# Allegro board SMA_Prototype_B.brd
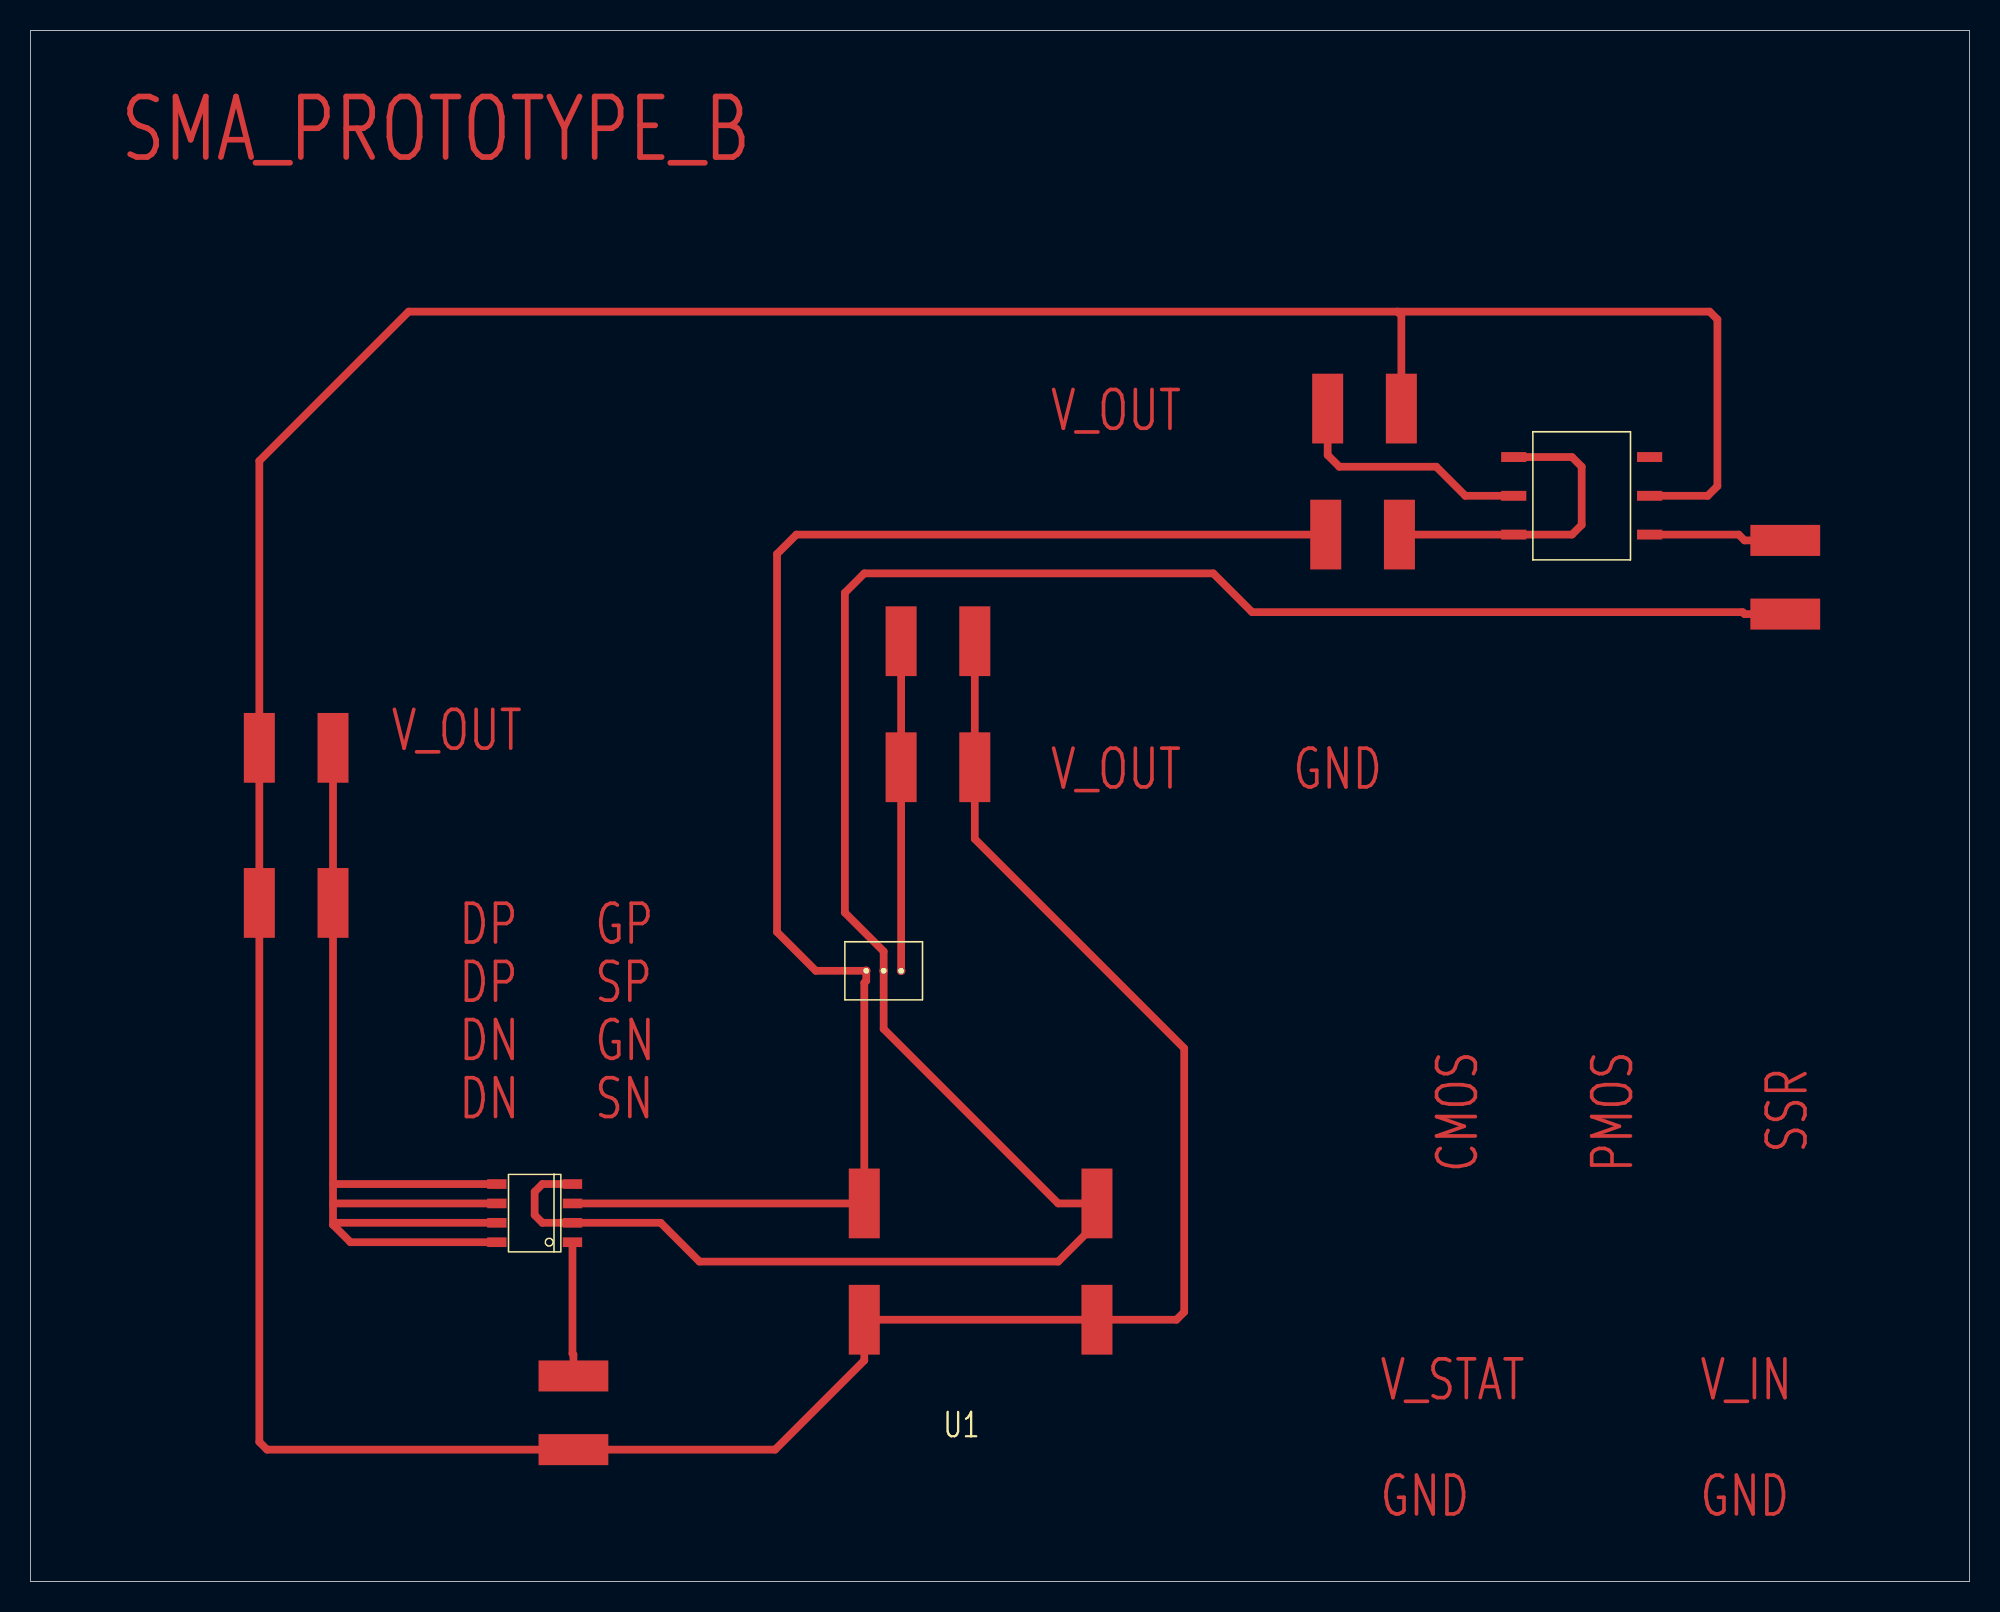
[diagram p0: board, top side]
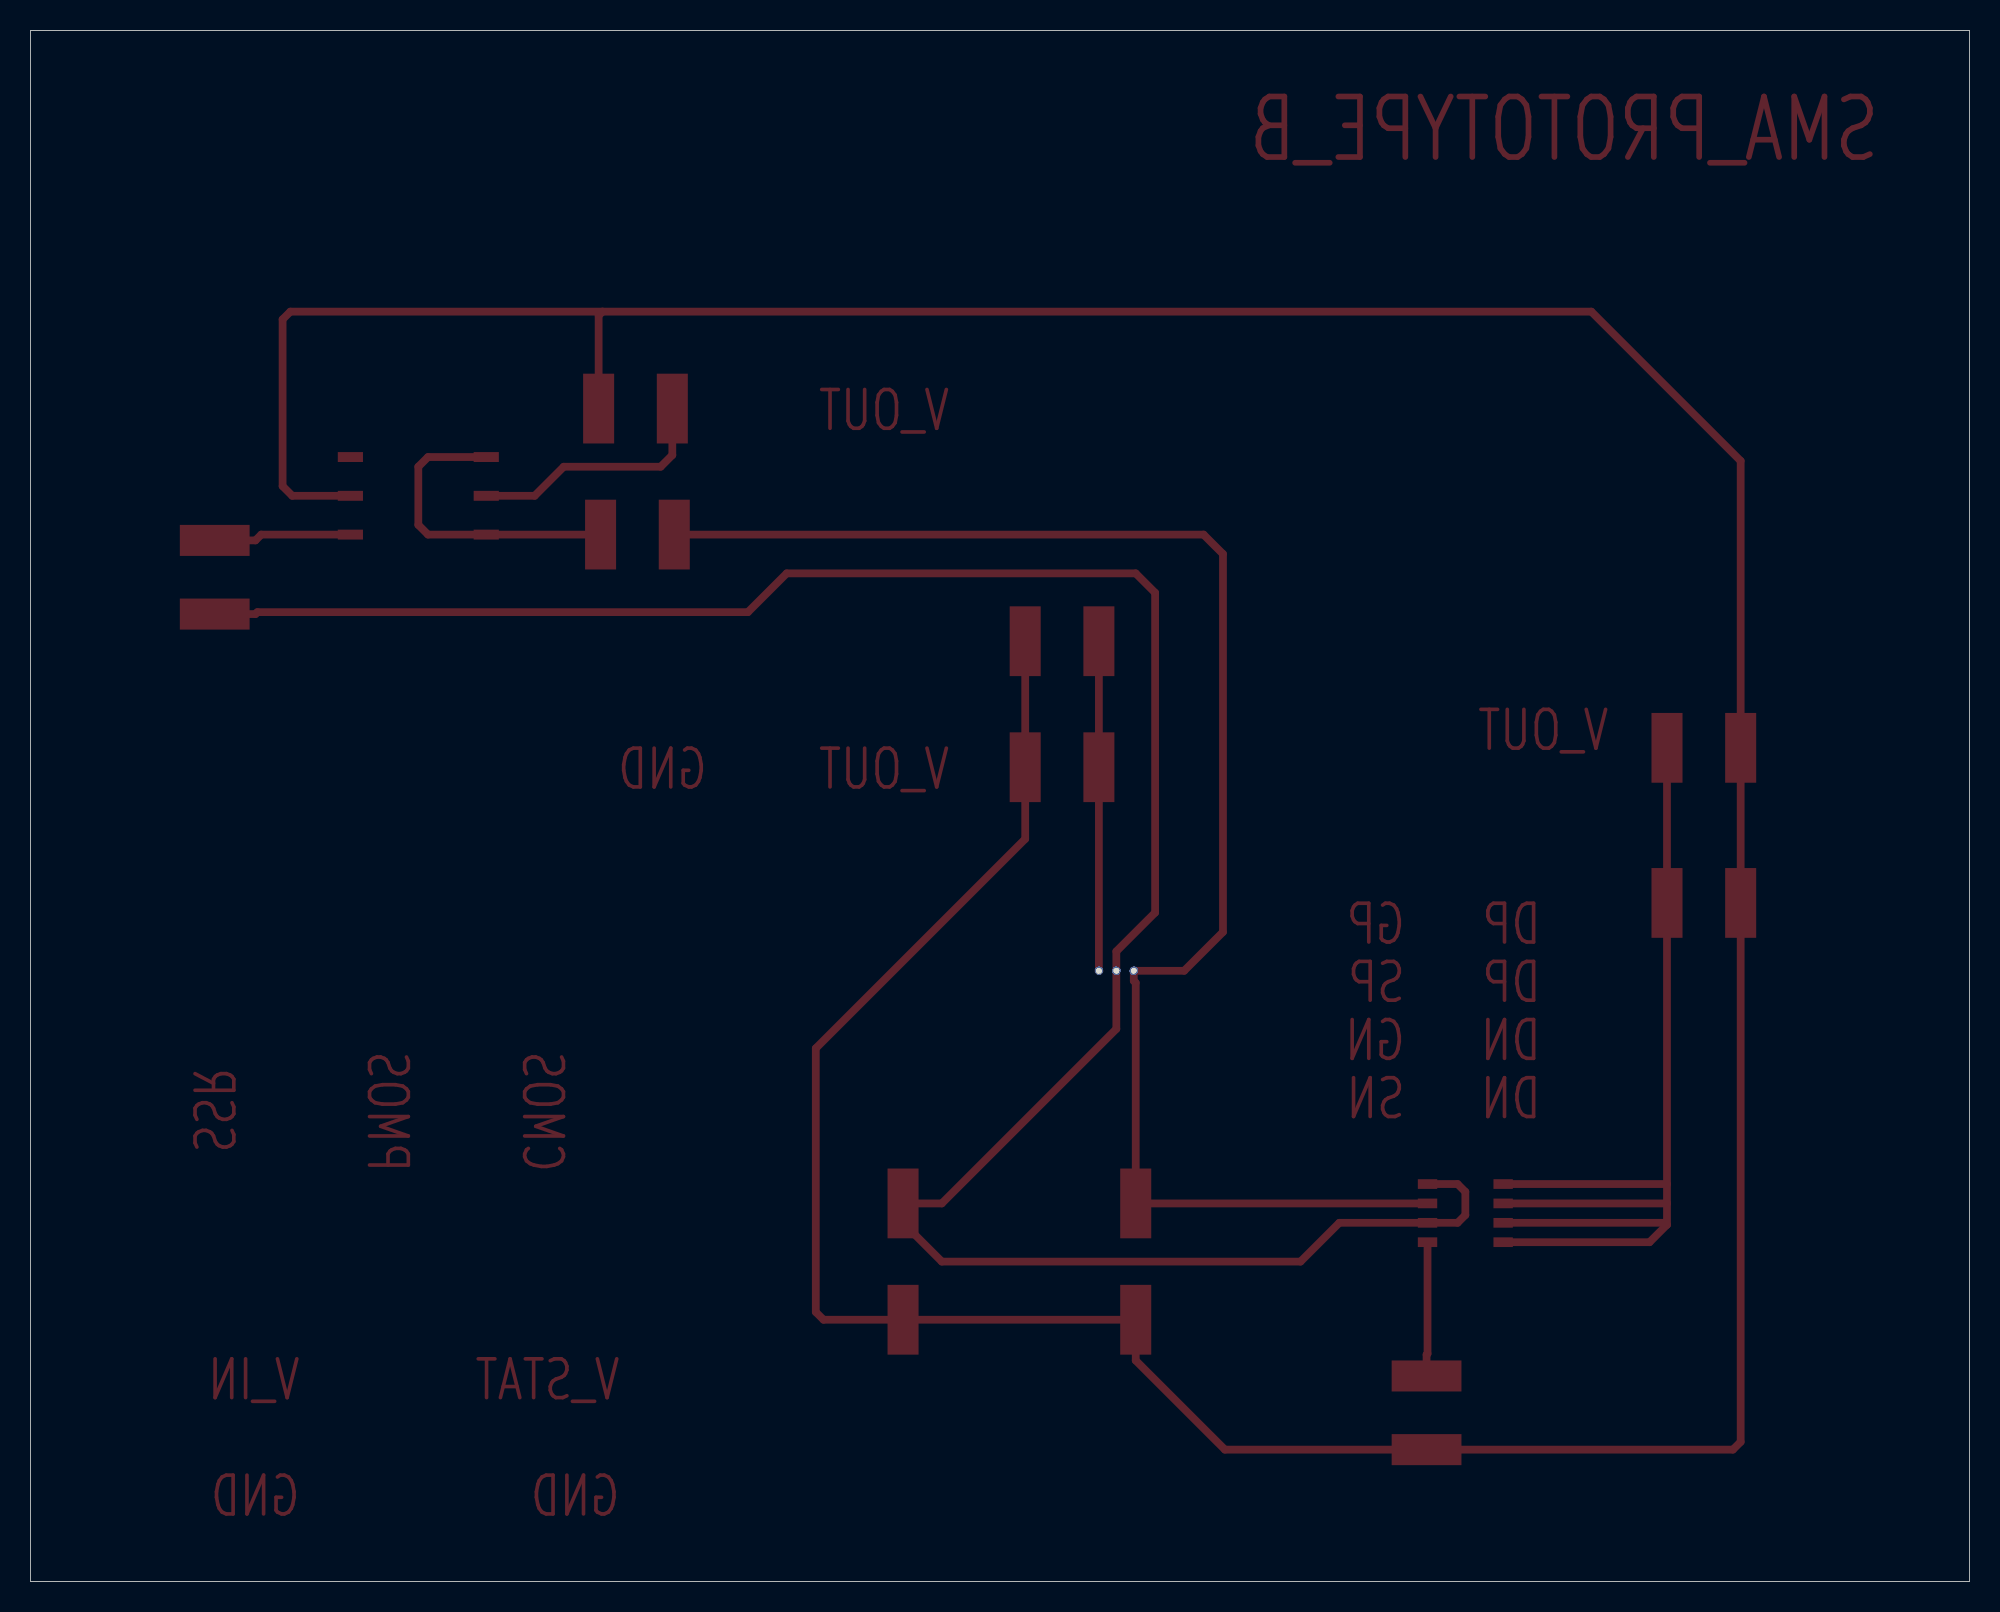
[diagram p1: board, bottom side, seen from below]

Outline 127 x 101.6 mm; copper layers: TOP, BOTTOM. Coordinates in mm from the lower left corner of the outline.
Outline path: 0,101.6 0,0 127,0 127,101.6 0,101.6

## Design rules (mm)
constraint set DEFAULT: min track width 0.127

## Placement (name value [footprint] x y rotation side)
C1  CAP  [LARGE_R_C]  57.78 61.59 0 top
C2  CAP  [LARGE_R_C]  57.78 53.34 0 top
C3  CAP  [LARGE_R_C]  19.05 54.61 180 top
C4  CAP  [LARGE_R_C]  19.05 44.45 180 top
C5  CAP  [LARGE_R_C]  85.72 76.83 0 top
Q1  MOSFET P  [VP0550-1]  55.88 40 90 top
R1  1M  [LARGE_R_C]  35.56 12.7 270 top
R2  1M  [LARGE_R_C]  88.9 68.58 180 top
R3  4.7k  [LARGE_R_C]  114.94 64.13 90 top
U1  -  [B00JVJDEZE]  54.61 22.22 0 top
U2  -  [PLA170]  101.6 71.12 180 top
U3  -  [TC1550]  33.02 24.13 180 top

## Library data of the parts
C1-C5 = CAP
Q1 = MOSFET P_1
R1-R3 = RESISTOR
U1 = B00JVJDEZE
U2 = PLA170_0
U3 = TC1550: Tolerance: ***; User Part Number: ***

## Footprints (pads in the part's own frame, mm; a bottom-side part is the same pattern mirrored in y, then rotated)
B00JVJDEZE
  rect 2.032x4.572 smd: 1(15.24,2.54) 2(0,-5.08) 3(0,2.54) 4(15.24,-5.08)
LARGE_R_C
  rect 2.032x4.572 smd: 1(-0.762,0) 2(4.064,0)
PLA170
  rect 1.65x0.65 smd: 1(-4.45,2.54) 2(-4.45,0) 3(-4.45,-2.54) 4(4.45,-2.54) 5(4.45,0) 6(4.45,2.54)
TC1550
  rect 1.27x0.635 smd: 1(-2.477,1.905) 2(-2.477,0.635) 3(-2.477,-0.635) 4(-2.477,-1.905) 5(2.477,-1.905) 6(2.477,-0.635) 7(2.477,0.635) 8(2.477,1.905)
VP0550-1
  round 0.559 hole 0.381: 1(0,1.143) 2(0,0) 3(0,-1.143)

## Nets
GND: C1.2 C2.2 C3.2 C4.2 C5.2 R1.2 U1.2 U1.4(VOUT-) U2.2
V_IN: Q1.2 R3.1 U1.1 U3.2 U3.4
V_STAT: Q1.1(SOURCE) R2.2 U1.3 U3.3(SP)
N01265: C1.1 C2.1 Q1.3
N01557: C3.1 C4.1 U3.5 U3.6 U3.7 U3.8
N01854: R1.1 U3.1
N02150: R3.2 U2.1
N02154: R2.1 U2.4(NC2) U2.6
N03794: C5.1 U2.5

Pads without a net: U2 3

## Routing (per net, layer and track width the routed paths; a pad name or vN(x,y) marks a point on that pad's centre or on a via; arc(x,y) is an arc through that point)
GND: length 301.8
  TOP w0.508: U2.2 109.86,71.12 110.49,71.75 110.49,82.68 109.98,83.19 89.53,83.19 ; 89.53,83.19 24.77,83.19 14.99,73.41 C3.2 C4.2 14.99,9.14 15.49,8.64 R1.2 48.77,8.64 54.61,14.48 U1.2 U1.4 75.06,17.14 75.56,17.65 75.56,34.92 61.85,48.64 C2.2 C1.2 ; 89.53,83.19 89.79,82.93 C5.2
V_IN: length 156.2
  TOP w0.508: U3.4 33.53,26.03 33.02,25.53 33.02,24 33.53,23.49 U3.2 41.27,23.49 43.81,20.95 67.31,20.95 69.85,23.49 U1.1 67.31,24.77 55.88,36.19 Q1.2 55.88,41.27 53.34,43.81 53.34,64.77 54.61,66.04 77.47,66.04 80.01,63.5 112.14,63.5 112.27,63.37 R3.1
V_STAT: length 102.5
  TOP w0.508: R2.2 50.16,68.58 48.9,67.31 48.9,42.54 51.44,40 Q1.1 54.74,39.34 54.61,39.22 U1.3 U3.3
N01265: length 21.6
  TOP w0.508: Q1.3 57.02,61.59
N01557: length 74.7
  TOP w0.508: U3.8 20.95,22.22 19.81,23.37 ; 19.81,26.03 C4.1 C3.1 ; 19.81,26.03 19.81,24.77 ; 19.81,26.03 U3.5 ; U3.7 19.94,23.49 19.81,23.37 ; 19.81,24.77 19.81,23.37 ; 19.81,24.77 U3.6
N01854: length 8.8
  TOP w0.508: U3.1 35.5,14.92 35.56,14.86 R1.1
N02150: length 9
  TOP w0.508: U2.1 111.89,68.58 112.27,68.2 R3.2
N02154: length 20.7
  TOP w0.508: R2.1 U2.6 100.97,68.58 101.6,69.22 101.6,73.02 100.97,73.66 U2.4
N03794: length 16.3
  TOP w0.508: U2.5 93.98,71.12 92.08,73.02 85.72,73.02 84.96,73.79 C5.1

## Text on the board
TOP: V_OUT | DP | DN | GP | SP | GN | SN | GND | V_STAT | V_IN | CMOS | PMOS | SSR | SMA_PROTOTYPE_B
